# Altium PCB Energyharvesting3.0.PcbDoc
Units mil, origin at the board's own origin, x right, y up, seen from the top; angles counter-clockwise.
Board outline 2500 x 1460 mil, 2 copper layers (Top Layer, Bottom Layer); 19 components, 16 nets, 57 pads, 7 vias.
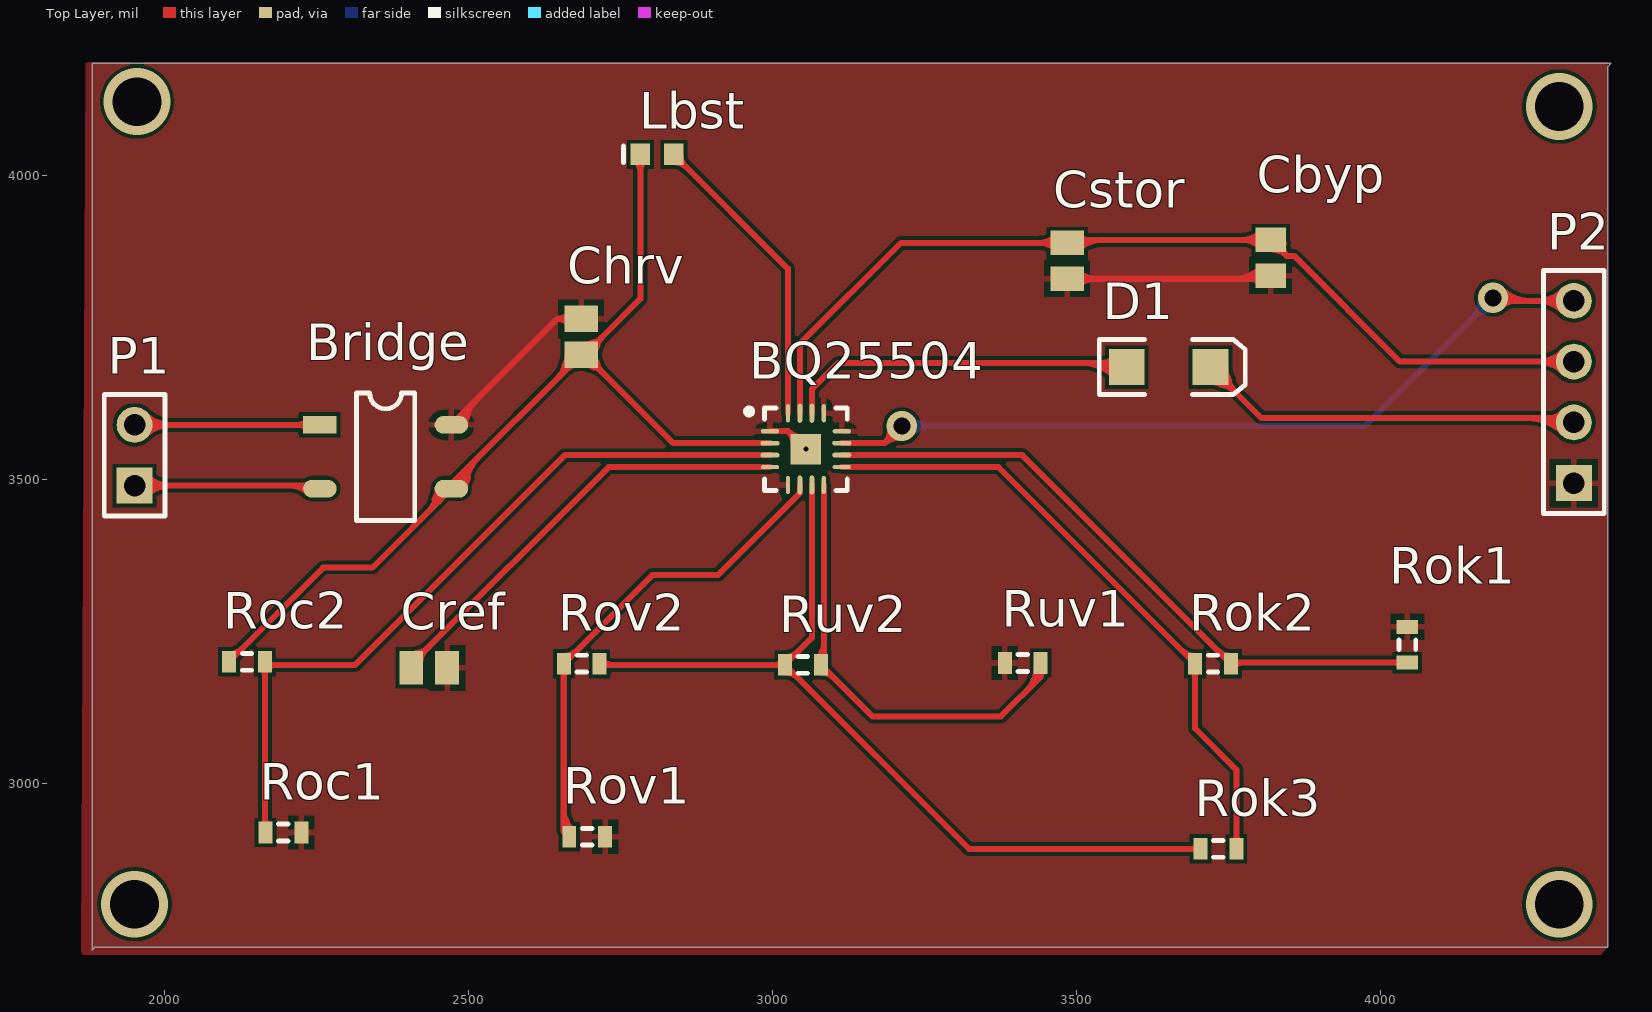
[diagram p0: Top Layer view]
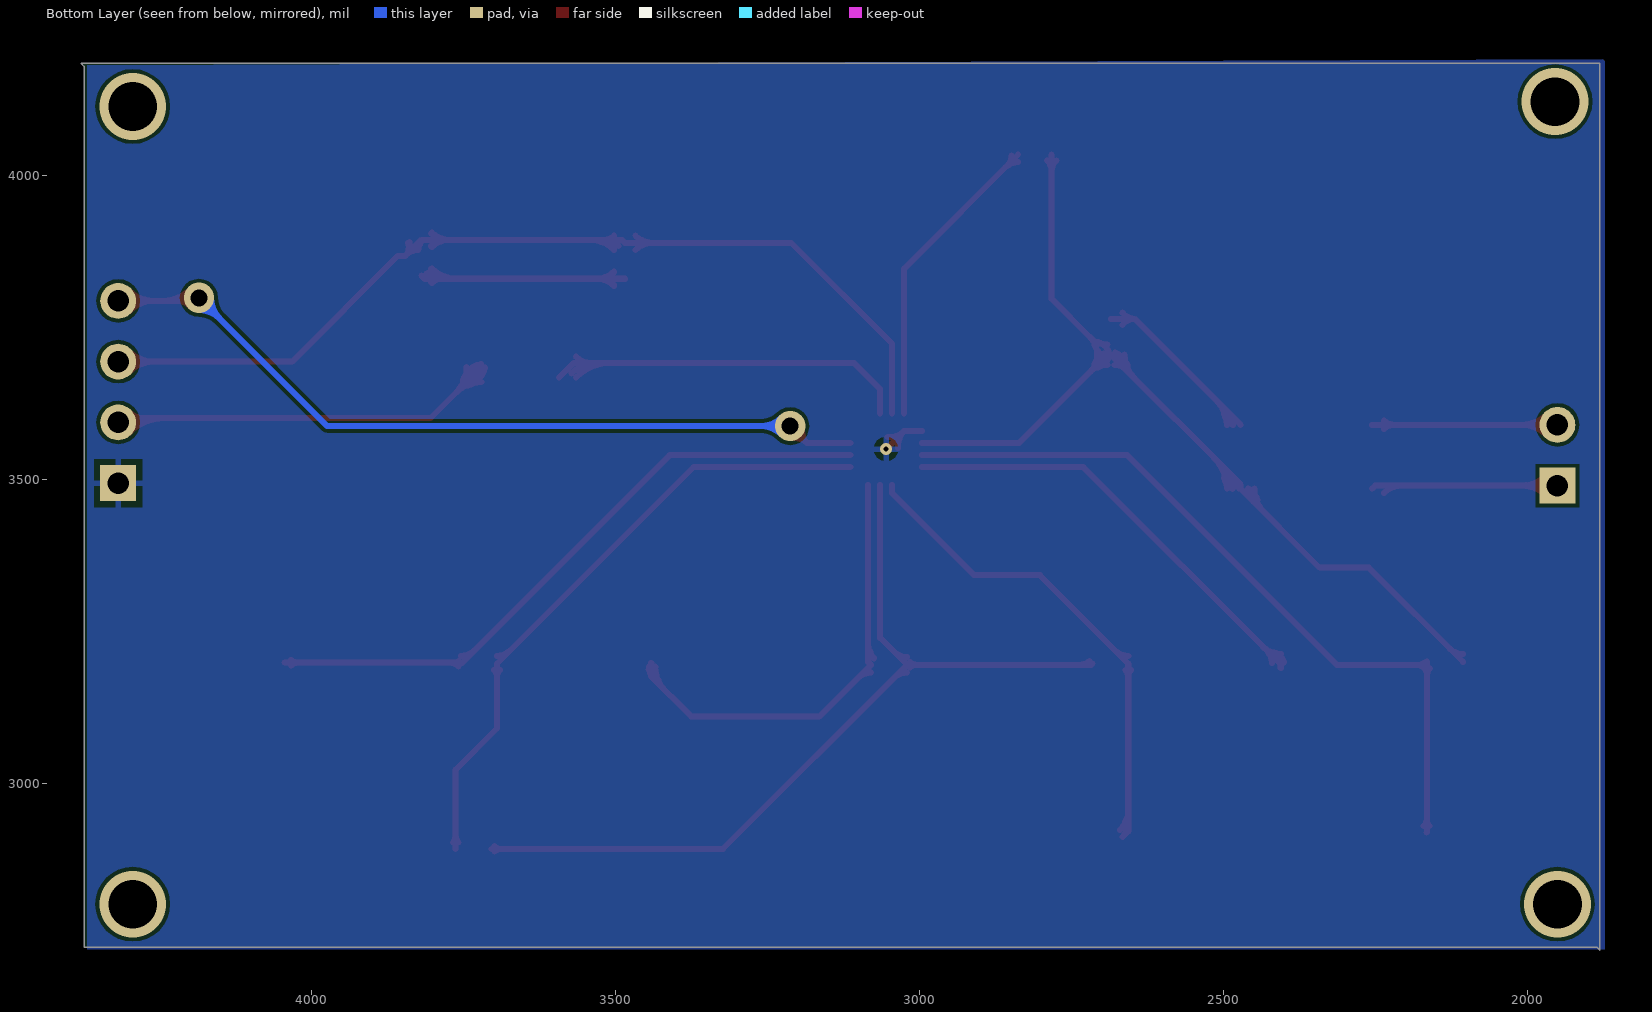
[diagram p1: Bottom Layer view, seen from below]

## Layer stack, top to bottom
Top Layer: signal copper 1.4
Dielectric: dielectric 12.6, FR-4, Dk 4.8
Bottom Layer: signal copper 1.4

## Board outline
1880,3280 1880,4185 4380,4185 4375,4180 4375,2730 1885,2730 1880,2725 1880,3270

## Design rules (kind name [scope] priority, off if disabled: settings)
Clearance [All] p1: gap=6
HoleToHoleClearance [All] p1: gap=8 allowstackedmicrovias=TRUE
MinimumSolderMaskSliver [All] p1: minsoldermaskwidth=8
PolygonConnect [All] p1: connectstyle=Relief reliefconductorwidth=10 reliefentries=4 polygonreliefangle="90 Angle" airgapwidth=10
RoutingVias [All] p1: holewidth=28 width=50 viastyle="Through Hole" minholewidth=28 minwidth=50 maxholewidth=28 maxwidth=50
SilkToSolderMaskClearance [IsPad] p1: minsilkscreentomaskgap=6 clearancetoexposedcopper=TRUE
SolderMaskExpansion [All] p1: expansion=4
Width [All] p1: maxlimit=10 minlimit=10 preferedwidth=10
25 further rules are at their usual default settings.

## Components (designator, comment, footprint, x,y, rotation, side; value= is the part's Value field where it differs from the comment)
BQ25504 "BQ25504RGTT" BQ25504rgtt 3055,3550 r0 top
Bridge "Bridge MB6s" MB6S 2255,3590 r0 top
Cbyp "Cap Pol3" C0805#1 3820,3865 r270 top
Chrv "Cap Pol3" C0805#2 2685,3735 r270 top
Cref "Cap Pol3" C0805#3 2435,3190 r180 top
Cstor "Cap Pol3" C0805#4 3485,3860 r270 top
D1 "LED2" 3.2X1.6X1.1 3652,3685 r0 top
Lbst "Inductor" INDC1608L 2810,4035 r0 top
P1 "Header 2" HDR1X2 1950,3490 r90 top
P2 "Header 4" HDR1X4 4319,3494 r90 top
Roc1 "Res3" J1-0603 2195,2919 r180 top
Roc2 "Res3" J1-0603 2135,3200 r180 top
Rok1 "Res3" J1-0603 4045,3228 r90 top
Rok2 "Res3" J1-0603 3725,3197 r0 top
Rok3 "Res3" J1-0603 3734,2892 r0 top
Rov1 "Res3" J1-0603 2695,2912 r180 top
Rov2 "Res3" J1-0603 2686,3197 r0 top
Ruv1 "Res3" J1-0603 3412,3198 r0 top
Ruv2 "Res3" J1-0603 3050,3195 r180 top

## Footprints (in the part's own frame and the unit in brackets; to place one, negate y for a bottom-side part, rotate by r counter-clockwise, add the part's x,y. Pads: shape width x height; smd on the part's side, far side on the other; paste and mask are expansions set on the pad)
3.2X1.6X1.1 [mm] "SMT LED; 2 Flat Leads"
  rect 1.5x1.5 smd: 1(-1.75,0) 2(1.75,0)
  silkscreen extent -2.9,-1.15 3.2,1.15
BQ25504rgtt [mm] "QFN, 16-Leads, Body 3.00x3.00mm, Pitch 0.50mm, Thermal Pad 1.66x1.66mm, IPC Medium Density"
  oval 0.762x0.178 smd: 1(-1.5,0.75) 4(-1.5,-0.75) 9(1.5,-0.75) 12(1.5,0.75)
  oval 0.8x0.2 smd: 2(-1.5,0.25) 3(-1.5,-0.25) 10(1.5,-0.25) 11(1.5,0.25)
  oval 0.178x0.762 smd: 5(-0.75,-1.5) 8(0.75,-1.5) 13(0.75,1.5) 16(-0.75,1.5)
  oval 0.2x0.8 smd: 6(-0.25,-1.5) 7(0.25,-1.5) 14(0.25,1.5) 15(-0.25,1.5)
  rect 1.27x1.27 smd: 17(0,0)
  silkscreen extent -2.5,-1.73 1.73,1.73, body extent -1.58,-1.58 1.58,1.58, height 1
C0805#1 [mil] "Chip Capacitor, Body 2.0x1.3mm, IPC High Density"
  rect 40x50 smd: 1(-29.53,0) 2(29.53,0)
  body extent -43,-29 43,29, height 55
C0805#2 [mil] "Chip Capacitor, Body 2.0x1.3mm, IPC High Density"
  rect 43.31x55.12 smd: 1(-29.53,0) 2(29.53,0)
  body extent -43,-29 43,29, height 55
C0805#3 [mil] "Chip Capacitor, Body 2.0x1.3mm, IPC High Density"
  rect 39.37x55.12 smd: 1(-29.53,0) 2(29.53,0)
  body extent -43,-29 43,29, height 55
C0805#4 [mil] "Chip Capacitor, Body 2.0x1.3mm, IPC High Density"
  rect 40x55.12 smd: 1(-29.53,0) 2(29.53,0)
  body extent -43,-29 43,29, height 55
HDR1X2 [mm] "Connector; Header; 2 Position"
  rect 1.5x1.5 hole 0.9: 1(0,0)
  round 1.5 hole 0.9: 2(2.54,0)
  silkscreen extent -1.27,-1.27 3.81,1.27
HDR1X4 [mm] "Connector; Header; 4 Position"
  rect 1.5x1.5 hole 0.9: 1(0,0)
  round 1.5 hole 0.9: 2(2.54,0) 3(5.08,0) 4(7.62,0)
  silkscreen extent -1.27,-1.27 8.89,1.27
INDC1608L [mm] "Chip Inductor, Body 1.6x0.8mm, IPC High Density"
  rect 0.8x0.9 smd: 1(-0.7,0) 2(0.7,0)
  silkscreen extent -1.4,-0.35 -1.4,0.35, body extent -0.87,-0.48 0.87,0.48, height 0.55
J1-0603 [mm] "Chip Resistor, Body 1.6x0.8mm, IPC High Density"
  rect 0.584x0.9 smd: 1(-0.75,0) 2(0.75,0)
  silkscreen extent -0.2,-0.35 0.2,0.35, body extent -0.85,-0.48 0.85,0.48, height 0.9
MB6S [mm]
  rect 1.4x0.74 smd: 1(0,0)
  oval 1.4x0.74 smd: 2(0,-2.67) 3(5.5,-2.67) 4(5.5,0)
  silkscreen extent 1.53,-4 3.97,1.33

## Part data
Cbyp Chrv Cref Cstor: "Polarized Capacitor (Surface Mount)"
D1: "Typical RED, GREEN, YELLOW, AMBER GaAs LED"
P1: "Header, 2-Pin"
P2: "Header, 4-Pin"
Roc1 Roc2 Rok1 Rok2 Rok3 Rov1 Rov2 Ruv1 Ruv2: "Resistor"

## Via types
v1: diameter 110, hole 80, Top Layer to Bottom Layer, 4 vias
v2: diameter 50, hole 28, Top Layer to Bottom Layer, 2 vias
v3: diameter 19.68, hole 7.87, Top Layer to Bottom Layer, 1 vias

## Nets (pads, with @x,y where several pads share a name; then routed paths per layer and width w, separated by ;. In a path a pad name is that pad's centre, name@x,y a point inside that pad or via, vN(x,y) a via of type N, cw(c..) or ccw(c..) an arc to the next point about the centre after c; other vN are vias at no path point)
GND: BQ25504.1 BQ25504.5 BQ25504.12 BQ25504.13 BQ25504.17 Bridge.4 Cbyp.2 Chrv.1 Cref.1 Cstor.2 P2.1 Roc1.1 Rok1.2 Rov1.1 Ruv1.1 | length 1843.2
  Top Layer w10: Bridge.4 2646.06,3764.53 ; Bridge.4@2487.8,3598.99 ccw(c2490.44,3606.26) 2495.91,3600.79 ccw(c2501.88,3594.82) Bridge.4@2493.75,3592.56 ; Chrv.1 2646.06,3764.53 ; BQ25504.1 3025.47,3579.53 ; v3(3055,3550) 3025.47,3579.53 ; Cstor.2 3815,3830.47 Cbyp.2 ; Cstor.2@3503.17,3819.87 cw(c3528.77,3794.26) 3528.77,3830.47 cw(c3528.77,3866.69) Cstor.2@3503.17,3841.08 ; 3766.72,3830.47 ccw(c3766.72,3883.76) Cbyp.2@3804.39,3846.08 ; Cbyp.2@3804.39,3824.87 ccw(c3790.86,3811.33) 3790.86,3830.47 ccw(c3790.86,3859.61) Cbyp.2@3811.46,3839.01 ; Bridge.4@2482.58,3599.37 ccw(c2481.14,3606.29) 2487.97,3604.46 ; Bridge.4@2482.58,3599.37 ccw(c2481.14,3606.29) 2487.97,3604.46 ; Bridge.4@2482.58,3599.37 ccw(c2481.14,3606.29) 2487.97,3604.46 ; Bridge.4@2484.09,3590 cw(c2514.41,3590) 2492.97,3611.44 ; Bridge.4@2484.09,3590 cw(c2514.41,3590) 2492.97,3611.44 ; Bridge.4@2484.09,3590 cw(c2514.41,3590) 2492.97,3611.44 ; Bridge.4@2484.74,3589.62 ccw(c2469.49,3616.04) 2498.96,3608.15 ; Bridge.4@2484.74,3589.62 ccw(c2469.49,3616.04) 2498.96,3608.15 ; Bridge.4@2484.74,3589.62 ccw(c2469.49,3616.04) 2498.96,3608.15 ; 2487.97,3604.46 ccw(c2494.23,3602.78) Bridge.4@2490.31,3597.62 ; 2487.97,3604.46 ccw(c2494.23,3602.78) Bridge.4@2490.31,3597.62 ; 2487.97,3604.46 ccw(c2494.23,3602.78) Bridge.4@2490.31,3597.62 ; Bridge.4@2494.09,3590 cw(c2548.56,3590) 2510.05,3628.51 ; Bridge.4@2494.09,3590 cw(c2548.56,3590) 2510.05,3628.51 ; Bridge.4@2494.09,3590 cw(c2548.56,3590) 2510.05,3628.51 ; 2646.06,3764.53 cw(c2646.06,3740.1) Chrv.1@2665.71,3754.62 ; 2646.06,3764.53 ccw(c2646.06,3788.96) Chrv.1@2665.71,3774.43 ; 2646.06,3764.53 ccw(c2646.06,3788.96) Chrv.1@2665.71,3774.43 ; 2646.06,3764.53 cw(c2646.06,3740.1) Chrv.1@2665.71,3754.62 ; 2646.06,3764.53 ccw(c2646.06,3788.96) Chrv.1@2665.71,3774.43 ; 2646.06,3764.53 cw(c2646.06,3740.1) Chrv.1@2665.71,3754.62 ; 3025.47,3579.53 cw(c3001.72,3555.77) BQ25504.17@3035.12,3552.16 ; 3025.47,3579.53 ccw(c3049.23,3603.28) BQ25504.17@3052.84,3569.88 ; 3025.47,3579.53 ccw(c3049.23,3603.28) BQ25504.17@3052.84,3569.88 ; 3025.47,3579.53 cw(c3001.72,3555.77) BQ25504.17@3035.12,3552.16 ; 3025.47,3579.53 ccw(c3049.23,3603.28) BQ25504.17@3052.84,3569.88 ; 3025.47,3579.53 cw(c3001.72,3555.77) BQ25504.17@3035.12,3552.16 ; BQ25504.17@3046.73,3558.27 cw(c3038.47,3550) BQ25504.17@3050.16,3550 ; BQ25504.17@3046.73,3558.27 ccw(c3055,3566.53) BQ25504.17@3055,3554.84 ; BQ25504.17@3046.73,3558.27 ccw(c3055,3566.53) BQ25504.17@3055,3554.84 ; BQ25504.17@3046.73,3558.27 cw(c3038.47,3550) BQ25504.17@3050.16,3550 ; BQ25504.17@3046.73,3558.27 ccw(c3055,3566.53) BQ25504.17@3055,3554.84 ; BQ25504.17@3046.73,3558.27 cw(c3038.47,3550) BQ25504.17@3050.16,3550 ; 3531.11,3830.47 ccw(c3531.11,3790.27) 3502.68,3818.7 cw(c3531.11,3790.27) 3531.11,3830.47 ; 3531.11,3830.47 cw(c3531.11,3870.68) 3502.68,3842.25 ccw(c3531.11,3870.68) 3531.11,3830.47 ; 3785.96,3830.47 ccw(c3785.96,3863.61) 3809.39,3840.18 cw(c3785.96,3863.61) 3785.96,3830.47 ; 3785.96,3830.47 cw(c3785.96,3807.34) 3802.32,3823.7 ccw(c3785.96,3807.34) 3785.96,3830.47 ; 3761.82,3830.47 ccw(c3761.82,3887.75) 3802.32,3847.25 cw(c3761.82,3887.75) 3761.82,3830.47
NetBQ25504_2: BQ25504.2 Bridge.3 Chrv.2 Lbst.1 Roc2.2 | length 2548.7
  Top Layer w10: Roc2.2 2260.47,3355 2341.65,3355 Bridge.3 2471.54,3492.01 Chrv.2 2690.71,3705.47 2836.34,3559.84 BQ25504.2 ; 2444.11,3466.73 cw(c2473.58,3458.84) Bridge.3@2458.33,3485.26 ; Bridge.3@2452.76,3477.26 cw(c2448.84,3472.1) 2455.1,3470.42 cw(c2461.93,3468.59) Bridge.3@2460.49,3475.52 ; Bridge.3@2479.74,3493.17 ccw(c2468.91,3511.93) 2489.84,3506.32 ; Bridge.3@2484.74,3484.51 ccw(c2469.49,3510.92) 2498.96,3503.03 ; 2490.27,3507.94 ccw(c2513.17,3501.81) Bridge.3@2492.76,3489.75 ; Chrv.2@2657.48,3686.95 cw(c2687.78,3678.83) Chrv.2@2678.06,3708.65 ; Chrv.2@2687.62,3704.81 ccw(c2713.36,3709.98) Chrv.2@2706.57,3684.62 ; Chrv.2@2687.62,3706.13 cw(c2713.36,3700.97) Chrv.2@2706.57,3726.32 ; Chrv.2@2690.91,3722.13 ccw(c2690.91,3761.87) 2719.01,3733.77 2782.44,3797.2 Lbst.1 ; Chrv.2@2691.59,3702.2 ccw(c2686.16,3728.18) Chrv.2@2711.8,3721.31 ; Chrv.2@2691.59,3708.75 cw(c2686.16,3682.76) Chrv.2@2711.8,3689.63 ; 2719.47,3734.23 ccw(c2748.23,3705.47) Chrv.2@2707.56,3705.47 ; Lbst.1@2774.84,4025.43 cw(c2756.49,4007.08) 2782.44,4007.08 cw(c2808.39,4007.08) Lbst.1@2790.04,4025.43 ; Chrv.2@2707.56,3705.47 ccw(c2748.23,3705.47) 2719.47,3676.72 cw(c2748.23,3705.47) Chrv.2@2707.56,3705.47 ; Roc2.2@2105.47,3212.72 ccw(c2105.47,3243.42) 2127.18,3221.71 cw(c2105.47,3243.42) Roc2.2@2105.47,3212.72 ; 2433.02,3446.37 ccw(c2394.51,3484.88) 2448.98,3484.88 cw(c2394.51,3484.88) 2433.02,3446.37 ; 2450.1,3463.44 ccw(c2428.66,3484.88) 2458.98,3484.88 cw(c2428.66,3484.88) 2450.1,3463.44 ; Bridge.3@2474.09,3484.88 cw(c2497.48,3484.88) 2480.94,3501.41 ccw(c2497.48,3484.88) Bridge.3@2474.09,3484.88 ; Bridge.3@2484.09,3484.88 cw(c2531.62,3484.88) 2498.01,3518.49 ccw(c2531.62,3484.88) Bridge.3@2484.09,3484.88 ; Bridge.3@2494.09,3484.88 cw(c2565.76,3484.88) 2515.08,3535.56 ccw(c2565.76,3484.88) Bridge.3@2494.09,3484.88 ; 2646.49,3666.96 ccw(c2607.98,3705.47) 2662.44,3705.47 cw(c2607.98,3705.47) 2646.49,3666.96 ; 2660.75,3681.22 cw(c2679.09,3662.87) 2679.09,3688.82 ccw(c2679.09,3662.87) 2660.75,3681.22 ; Chrv.2@2663.56,3684.03 ccw(c2642.12,3705.47) 2672.44,3705.47 cw(c2642.12,3705.47) Chrv.2@2663.56,3684.03 ; Chrv.2@2690.91,3688.82 cw(c2690.91,3649.08) 2719.01,3677.18 ccw(c2690.91,3649.08) Chrv.2@2690.91,3688.82
NetBQ25504_3: BQ25504.3 Roc1.2 Roc2.1 | length 1479.7
  Top Layer w10: Roc1.2 2164.53,2919.94 Roc2.1 2169.53,3195 2313,3195 2658.16,3540.16 BQ25504.3 ; Roc2.1@2159.93,3189.19 cw(c2148.84,3178.09) 2164.53,3178.09 ; Roc2.1@2159.93,3189.19 cw(c2148.84,3178.09) 2164.53,3178.09 ; Roc2.1@2159.93,3189.19 cw(c2148.84,3178.09) 2164.53,3178.09 ; Roc1.2@2160.88,2929.81 ccw(c2152.06,2938.63) 2164.53,2938.63 ; Roc1.2@2160.88,2929.81 ccw(c2152.06,2938.63) 2164.53,2938.63 ; Roc1.2@2160.88,2929.81 ccw(c2152.06,2938.63) 2164.53,2938.63 ; 2164.53,2943.19 ccw(c2183.45,2943.19) Roc1.2@2170.07,2929.81 ; 2164.53,2943.19 ccw(c2183.45,2943.19) Roc1.2@2170.07,2929.81 ; 2164.53,2943.19 ccw(c2183.45,2943.19) Roc1.2@2170.07,2929.81 ; 2164.53,3178.09 cw(c2180.22,3178.09) Roc2.1@2169.12,3189.19 ; 2164.53,3178.09 cw(c2180.22,3178.09) Roc2.1@2169.12,3189.19 ; 2164.53,3178.09 cw(c2180.22,3178.09) Roc2.1@2169.12,3189.19 ; Roc2.1@2169.12,3189.19 cw(c2183.16,3175.15) 2183.16,3195 ; Roc2.1@2169.12,3189.19 cw(c2183.16,3175.15) 2183.16,3195 ; Roc2.1@2169.12,3189.19 cw(c2183.16,3175.15) 2183.16,3195 ; Roc2.1@2169.12,3198.38 ccw(c2177.28,3206.54) 2177.28,3195 ; Roc2.1@2169.12,3198.38 ccw(c2177.28,3206.54) 2177.28,3195 ; Roc2.1@2169.12,3198.38 ccw(c2177.28,3206.54) 2177.28,3195
NetBQ25504_4: BQ25504.4 Cref.2 | length 866.1
  Top Layer w10: Cref.2@2400.32,3199.2 cw(c2422.35,3193.54) Cref.2@2416.47,3215.5 ; Cref.2 2405.47,3195.71 2730.23,3520.47 BQ25504.4 ; Cref.2@2405.47,3212.56 ccw(c2405.47,3253.23) 2434.23,3224.47 cw(c2405.47,3253.23) Cref.2@2405.47,3212.56 ; Cref.2@2420.16,3197.87 cw(c2450.4,3197.87) 2429.01,3219.26 ccw(c2450.4,3197.87) Cref.2@2420.16,3197.87
NetBQ25504_6: BQ25504.6 Rov1.2 Rov2.1 | length 1056.9
  Top Layer w10: Rov1.2@2659.85,2921.48 ccw(c2643.43,2930.99) 2659.87,2940.48 ; Rov1.2 2656.47,2921 Rov2.1 2802.01,3342.54 2910,3342.54 3045.16,3477.69 BQ25504.6 ; Rov2.1@2651.88,3186.19 cw(c2640.78,3175.09) 2656.47,3175.09 ; Rov2.1@2651.88,3186.19 cw(c2640.78,3175.09) 2656.47,3175.09 ; Rov2.1@2651.88,3186.19 cw(c2640.78,3175.09) 2656.47,3175.09 ; 2656.47,3175.09 cw(c2672.16,3175.09) Rov2.1@2661.07,3186.19 ; 2656.47,3175.09 cw(c2672.16,3175.09) Rov2.1@2661.07,3186.19 ; 2656.47,3175.09 cw(c2672.16,3175.09) Rov2.1@2661.07,3186.19 ; 2656.47,2931.49 ccw(c2678.75,2931.49) 2663,2915.74 cw(c2678.75,2931.49) 2656.47,2931.49 ; 2656.47,2955.64 ccw(c2702.89,2955.64) 2670.07,2922.81 cw(c2702.89,2955.64) 2656.47,2955.64 ; Rov2.1@2656.47,3209.72 ccw(c2656.47,3240.42) 2678.18,3218.71 cw(c2656.47,3240.42) Rov2.1@2656.47,3209.72
NetBQ25504_7: BQ25504.7 Rok3.1 Rov2.2 Ruv2.2 | length 1709.3
  Top Layer w10: Rov2.2 2717.53,3195 Ruv2.2 ; BQ25504.7 3064.84,3239.37 Ruv2.2 ; Rok3.1 3323.47,2892 Ruv2.2 ; 3004.78,3195 cw(c3004.78,3179.31) Ruv2.2@3015.88,3190.4 ; 3004.78,3195 ccw(c3004.78,3210.69) Ruv2.2@3015.88,3199.6 ; 3004.78,3195 ccw(c3004.78,3210.69) Ruv2.2@3015.88,3199.6 ; 3004.78,3195 cw(c3004.78,3179.31) Ruv2.2@3015.88,3190.4 ; 3004.78,3195 ccw(c3004.78,3210.69) Ruv2.2@3015.88,3199.6 ; 3004.78,3195 cw(c3004.78,3179.31) Ruv2.2@3015.88,3190.4 ; 3688.78,2892 cw(c3688.78,2876.31) Rok3.1@3699.88,2887.4 ; 3688.78,2892 ccw(c3688.78,2907.69) Rok3.1@3699.88,2896.6 ; 3688.78,2892 ccw(c3688.78,2907.69) Rok3.1@3699.88,2896.6 ; 3688.78,2892 cw(c3688.78,2876.31) Rok3.1@3699.88,2887.4 ; 3688.78,2892 ccw(c3688.78,2907.69) Rok3.1@3699.88,2896.6 ; 3688.78,2892 cw(c3688.78,2876.31) Rok3.1@3699.88,2887.4 ; Rov2.2@2720.12,3201.6 ccw(c2736.05,3217.52) 2736.05,3195 cw(c2736.05,3217.52) Rov2.2@2720.12,3201.6 ; Ruv2.2@3020.47,3182.28 cw(c3020.47,3151.58) 3042.18,3173.29 ccw(c3020.47,3151.58) Ruv2.2@3020.47,3182.28 ; Ruv2.2@3020.47,3207.72 ccw(c3020.47,3238.42) 3042.18,3216.71 cw(c3020.47,3238.42) Ruv2.2@3020.47,3207.72
NetBQ25504_8: BQ25504.8 Ruv1.2 Ruv2.1 | length 1144.9
  Top Layer w10: BQ25504.8 3084.53,3200 Ruv2.1 3164.53,3110 3376,3110 3441.53,3175.53 Ruv1.2 ; 3427.48,3163.61 cw(c3463.34,3154) Ruv1.2@3444.78,3186.15 ; Ruv2.1@3074.93,3205.81 ccw(c3051.76,3228.98) 3084.53,3228.98 ; Ruv2.1@3074.93,3205.81 ccw(c3051.76,3228.98) 3084.53,3228.98 ; Ruv2.1@3074.93,3205.81 ccw(c3051.76,3228.98) 3084.53,3228.98 ; 3081.6,3217.36 ccw(c3089.14,3213) Ruv2.1@3083.64,3206.25 ; 3081.6,3217.36 ccw(c3089.14,3213) Ruv2.1@3083.64,3206.25 ; 3081.6,3217.36 ccw(c3089.14,3213) Ruv2.1@3083.64,3206.25 ; Ruv1.2@3436.93,3187.19 cw(c3425.84,3176.09) 3441.53,3176.09 ; Ruv1.2@3436.93,3187.19 cw(c3425.84,3176.09) 3441.53,3176.09 ; Ruv1.2@3436.93,3187.19 cw(c3425.84,3176.09) 3441.53,3176.09 ; 3441.53,3176.09 cw(c3457.22,3176.09) Ruv1.2@3446.12,3187.19 ; 3441.53,3176.09 cw(c3457.22,3176.09) Ruv1.2@3446.12,3187.19 ; 3441.53,3176.09 cw(c3457.22,3176.09) Ruv1.2@3446.12,3187.19 ; Ruv2.1@3079.53,3182.28 cw(c3079.53,3151.58) 3101.24,3173.29 ccw(c3079.53,3151.58) Ruv2.1@3079.53,3182.28 ; 3418.94,3152.94 ccw(c3380.09,3191.78) 3435.03,3191.78 cw(c3380.09,3191.78) 3418.94,3152.94 ; 3436.01,3170.01 ccw(c3414.23,3191.78) 3445.03,3191.78 cw(c3414.23,3191.78) 3436.01,3170.01
NetBQ25504_9: BQ25504.9 Rok2.1 Rok3.2 | length 1244.7
  Top Layer w10: BQ25504.9 3372,3520.47 Rok2.1 3695.47,3090.53 3763.53,3022.47 Rok3.2 ; Rok2.1@3690.88,3186.19 cw(c3679.78,3175.09) 3695.47,3175.09 ; Rok2.1@3690.88,3186.19 cw(c3679.78,3175.09) 3695.47,3175.09 ; Rok2.1@3690.88,3186.19 cw(c3679.78,3175.09) 3695.47,3175.09 ; 3695.47,3175.09 cw(c3711.16,3175.09) Rok2.1@3700.07,3186.19 ; 3695.47,3175.09 cw(c3711.16,3175.09) Rok2.1@3700.07,3186.19 ; 3695.47,3175.09 cw(c3711.16,3175.09) Rok2.1@3700.07,3186.19 ; Rok3.2@3758.93,2902.81 ccw(c3747.84,2913.91) 3763.53,2913.91 ; Rok3.2@3758.93,2902.81 ccw(c3747.84,2913.91) 3763.53,2913.91 ; Rok3.2@3758.93,2902.81 ccw(c3747.84,2913.91) 3763.53,2913.91 ; 3763.53,2913.91 ccw(c3779.22,2913.91) Rok3.2@3768.12,2902.81 ; 3763.53,2913.91 ccw(c3779.22,2913.91) Rok3.2@3768.12,2902.81 ; 3763.53,2913.91 ccw(c3779.22,2913.91) Rok3.2@3768.12,2902.81 ; 3673.76,3218.71 ccw(c3695.47,3240.42) 3695.47,3209.72 cw(c3695.47,3240.42) 3673.76,3218.71
NetBQ25504_10: BQ25504.10 Rok1.1 Rok2.2 | length 1269.8
  Top Layer w10: BQ25504.10 3411.37,3540.16 Rok2.2 3756,3198.47 Rok1.1 ; Rok2.2@3759.12,3192.4 cw(c3773.77,3177.75) 3773.77,3198.47 ; Rok2.2@3759.12,3192.4 cw(c3773.77,3177.75) 3773.77,3198.47 ; Rok2.2@3759.12,3192.4 cw(c3773.77,3177.75) 3773.77,3198.47 ; Rok2.2@3759.12,3201.6 ccw(c3766.67,3209.14) 3766.67,3198.47 ; Rok2.2@3759.12,3201.6 ccw(c3766.67,3209.14) 3766.67,3198.47 ; Rok2.2@3759.12,3201.6 ccw(c3766.67,3209.14) 3766.67,3198.47 ; 4023.09,3198.47 cw(c4023.09,3182.78) Rok1.1@4034.19,3193.88 ; 4023.09,3198.47 ccw(c4023.09,3214.16) Rok1.1@4034.19,3203.07 ; 4023.09,3198.47 ccw(c4023.09,3214.16) Rok1.1@4034.19,3203.07 ; 4023.09,3198.47 cw(c4023.09,3182.78) Rok1.1@4034.19,3193.88 ; 4023.09,3198.47 ccw(c4023.09,3214.16) Rok1.1@4034.19,3203.07 ; 4023.09,3198.47 cw(c4023.09,3182.78) Rok1.1@4034.19,3193.88 ; 3732.82,3218.71 ccw(c3754.53,3240.42) 3754.53,3209.72 cw(c3754.53,3240.42) 3732.82,3218.71
NetBQ25504_11: BQ25504.11 P2.4 | length 2298.1
  Top Layer w10: BQ25504.11 3184.84,3559.84 ; 3191.2,3567.9 cw(c3232.74,3563.05) v2@3206.8,3595.84 ; 3192.9,3566.2 ccw(c3188.05,3607.74) v2@3220.84,3581.8 ; v2(3213,3588) 3184.84,3559.84 ; v2(4186,3799) 4191,3794 P2.4 ; 3184.84,3559.84 cw(c3205.8,3538.89) 3210.1,3568.21 ccw(c3205.8,3538.89) 3184.84,3559.84 ; 3184.84,3559.84 ccw(c3163.89,3580.8) 3193.21,3585.1 cw(c3163.89,3580.8) 3184.84,3559.84 ; 4222.21,3794 cw(c4222.21,3835.21) 4193.07,3806.07 ccw(c4222.21,3835.21) 4222.21,3794 ; 4222.21,3794 ccw(c4222.21,3762.79) 4200.14,3784.86 cw(c4222.21,3762.79) 4222.21,3794 ; 4259.79,3794 cw(c4259.79,3734.79) 4301.66,3776.66 ccw(c4259.79,3734.79) 4259.79,3794 ; 4259.79,3794 ccw(c4259.79,3853.21) 4301.66,3811.34 cw(c4259.79,3853.21) 4259.79,3794 ; 4283.93,3794 cw(c4283.93,3758.93) 4308.73,3783.73 ccw(c4283.93,3758.93) 4283.93,3794 ; 4283.93,3794 ccw(c4283.93,3829.07) 4308.73,3804.27 cw(c4283.93,3829.07) 4283.93,3794 ; v2@4200.14,3813.14 ccw(c4246.36,3859.36) 4246.36,3794 cw(c4246.36,3859.36) v2@4200.14,3813.14
  Bottom Layer w10: v2(3213,3588) 3975,3588 v2(4186,3799) ; 3261.28,3588 cw(c3261.28,3636.28) 3227.14,3602.14 ccw(c3261.28,3636.28) 3261.28,3588 ; 3261.28,3588 ccw(c3261.28,3539.72) 3227.14,3573.86 cw(c3261.28,3539.72) 3261.28,3588 ; 4151.86,3764.86 cw(c4186,3730.72) 4186,3779 ccw(c4186,3730.72) 4151.86,3764.86 ; 4151.86,3764.86 ccw(c4117.72,3799) 4166,3799 cw(c4117.72,3799) 4151.86,3764.86
NetBQ25504_14: BQ25504.14 D1.1 | length 874.5
  Top Layer w10: BQ25504.14 3064.84,3648.84 3108,3692 3569.1,3692 D1.1@3593.1,3668 ; 3506.99,3692 cw(c3506.99,3608.89) 3565.76,3667.66 ccw(c3506.99,3608.89) 3506.99,3692 ; 3531.13,3692 cw(c3531.13,3633.03) 3572.83,3674.73 ccw(c3531.13,3633.03) 3531.13,3692 ; 3540.79,3692 ccw(c3540.79,3727.32) 3565.76,3702.34 cw(c3540.79,3727.32) 3540.79,3692
NetBQ25504_15: BQ25504.15 Cbyp.1 Cstor.1 P2.3 | length 2430.5
  Top Layer w10: BQ25504.15 3045.16,3723.16 3211.53,3889.53 Cstor.1 3490,3894.53 Cbyp.1 3846.4,3868.13 ; Cstor.1@3466.83,3878.92 ccw(c3441.23,3853.31) 3441.23,3889.53 ccw(c3441.23,3925.74) Cstor.1@3466.83,3900.13 ; Cstor.1@3467.32,3877.75 ccw(c3438.89,3849.32) 3438.89,3889.53 ccw(c3438.89,3929.73) Cstor.1@3467.32,3901.3 ; Cstor.1@3495.61,3884.82 cw(c3519.04,3861.39) 3519.04,3894.53 cw(c3519.04,3917.66) Cstor.1@3502.68,3901.3 ; Cstor.1@3496.09,3885.99 cw(c3516.7,3865.39) 3516.7,3894.53 cw(c3516.7,3913.67) Cstor.1@3503.17,3900.13 ; Cstor.1@3502.68,3877.75 cw(c3543.18,3837.25) 3543.18,3894.53 ; Cstor.1@3503.17,3878.92 cw(c3540.84,3841.24) 3540.84,3894.53 ; Cbyp.1@3802.32,3882.75 ccw(c3773.89,3854.32) 3773.89,3894.53 ccw(c3773.89,3934.73) Cbyp.1@3802.32,3906.3 ; Cbyp.1@3804.39,3883.92 ccw(c3778.79,3858.31) 3778.79,3894.53 ccw(c3778.79,3930.74) Cbyp.1@3804.39,3905.13 ; Cbyp.1@3825,3879.53 cw(c3825,3855.39) 3842.07,3872.46 ; Cbyp.1@3839.65,3891.29 ccw(c3864.14,3885.87) 3846.4,3868.13 ; P2.3 4032.69,3694 3858.56,3868.13 3846.4,3868.13 ; 3846.4,3868.13 cw(c3860.65,3882.38) 3841.63,3889.03 ccw(c3860.65,3882.38) 3846.4,3868.13 ; 4259.79,3694 cw(c4259.79,3634.79) 4301.66,3676.66 ccw(c4259.79,3634.79) 4259.79,3694 ; 4259.79,3694 ccw(c4259.79,3753.21) 4301.66,3711.34 cw(c4259.79,3753.21) 4259.79,3694 ; 4283.93,3694 cw(c4283.93,3658.93) 4308.73,3683.73 ccw(c4283.93,3658.93) 4283.93,3694 ; 4283.93,3694 ccw(c4283.93,3729.07) 4308.73,3704.27 cw(c4283.93,3729.07) 4283.93,3694 ; Cbyp.1@3820.04,3893.89 ccw(c3842.38,3896.78) 3836.55,3875.02 cw(c3842.38,3896.78) Cbyp.1@3820.04,3893.89 ; Cbyp.1@3825.91,3877.87 cw(c3825.91,3851.93) 3844.25,3870.27 ccw(c3825.91,3851.93) Cbyp.1@3825.91,3877.87
NetBQ25504_16: BQ25504.16 Lbst.2 | length 544.5
  Top Layer w10: Lbst.2@2837.56,4022.28 cw(c2837.56,3991.58) 2859.27,4013.29 ; Lbst.2 3025.47,3847.09 BQ25504.16 ; Lbst.2@2848.31,4033.03 ccw(c2869.5,4033.03) 2854.52,4018.04
NetBridge_1: Bridge.1 P1.2 | length 673.8
  Top Layer w10: P1.2 Bridge.1 ; 1985.07,3590 cw(c1985.07,3625.07) 1960.27,3600.27 ccw(c1985.07,3625.07) 1985.07,3590 ; 1985.07,3590 ccw(c1985.07,3554.93) 1960.27,3579.73 cw(c1985.07,3554.93) 1985.07,3590 ; 2009.21,3590 cw(c2009.21,3649.21) 1967.34,3607.34 ccw(c2009.21,3649.21) 2009.21,3590 ; 2009.21,3590 ccw(c2009.21,3530.79) 1967.34,3572.66 cw(c2009.21,3530.79) 2009.21,3590 ; 2218.91,3590 cw(c2218.91,3566.9) 2235.24,3583.24 ccw(c2218.91,3566.9) 2218.91,3590 ; 2218.91,3590 ccw(c2218.91,3613.1) 2235.24,3596.76 cw(c2218.91,3613.1) 2218.91,3590
NetBridge_2: Bridge.2 P1.1 | length 667.1
  Top Layer w10: P1.1 2249.88,3490 Bridge.2 ; 1985.07,3490 cw(c1985.07,3525.07) 1960.27,3500.27 ccw(c1985.07,3525.07) 1985.07,3490 ; 1985.07,3490 ccw(c1985.07,3454.93) 1960.27,3479.73 cw(c1985.07,3454.93) 1985.07,3490 ; 2009.21,3490 cw(c2009.21,3549.21) 1967.34,3507.34 ccw(c2009.21,3549.21) 2009.21,3490 ; 2009.21,3490 ccw(c2009.21,3430.79) 1967.34,3472.66 cw(c2009.21,3430.79) 2009.21,3490 ; 2206.56,3490 cw(c2206.56,3449.43) 2235.24,3478.12 ccw(c2206.56,3449.43) 2206.56,3490
NetD1_2: D1.2 P2.2 | length 1308.5
  Top Layer w10: D1.2@3715.54,3683.9 ccw(c3753.19,3691.61) 3743.25,3654.48 ; D1.2 3804.9,3601 P2.2@4312,3601 ; D1.2@3722,3690.36 cw(c3714.28,3652.7) 3751.41,3662.65 ; P2.2@4303,3610 P2.2@4312,3601 ; P2.2 P2.2@4312,3601 ; D1.2@3745.7,3660.2 cw(c3770.5,3685) 3735.43,3685 ccw(c3770.5,3685) D1.2@3745.7,3660.2 ; D1.2@3745.7,3660.2 ccw(c3720.9,3635.4) 3720.9,3670.47 cw(c3720.9,3635.4) D1.2@3745.7,3660.2 ; 3762.77,3643.13 cw(c3804.64,3685) 3745.43,3685 ccw(c3804.64,3685) 3762.77,3643.13 ; 3762.77,3643.13 ccw(c3720.9,3601.26) 3720.9,3660.47 cw(c3720.9,3601.26) 3762.77,3643.13 ; 4242.89,3601 cw(c4242.89,3517.89) 4301.66,3576.66 ccw(c4242.89,3517.89) 4242.89,3601 ; 4267.03,3601 cw(c4267.03,3542.03) 4308.73,3583.73 ccw(c4267.03,3542.03) 4267.03,3601 ; 4276.68,3601 ccw(c4276.68,3636.32) 4301.66,3611.34 cw(c4276.68,3636.32) 4276.68,3601
copper on no net:
  other v1: 1950,2801 4295,2801 4295,4114 1954,4122

## Polygon pours and split planes (outlines as drawn)
GND on Bottom Layer "Top Layer-No Net" (solid, pour order 10): 4370,4182 4370,2727 4373,2724 4370,2727 1872,2727 1872,4192
GND on Top Layer "Top Layer-No Net" (solid, pour order 6): 1870,4191 1874,4187 4374,4187 4374,2729 4370,2725 4363,2718 1862,2718

## Silkscreen, mask and mechanical layers (free items; w line width, h text height)
Mechanical 1:
  lines w10: 1874,2723 1874,4189 4370,4189 4373,4186 4373,2728 4375,2726 1877,2726 1874,2723